# EAGLE board lm3410-boost-flashlight-driver-17mm-mk-1.0 (EAGLE 7.5.0)
VERSION: v1.0
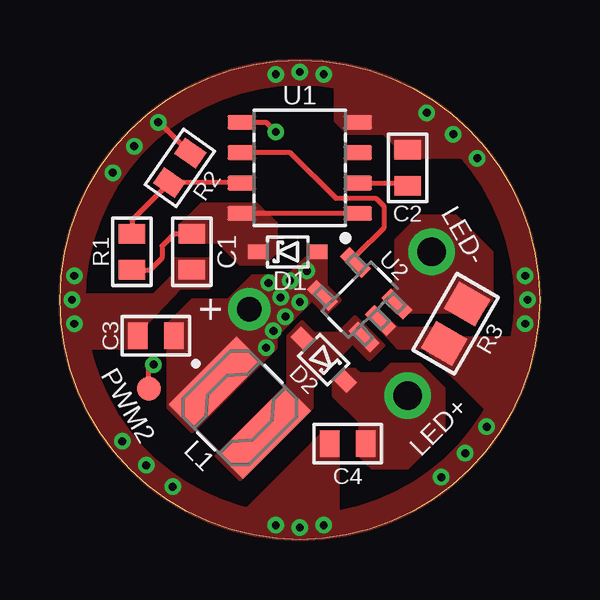
[diagram p0: board, top side]
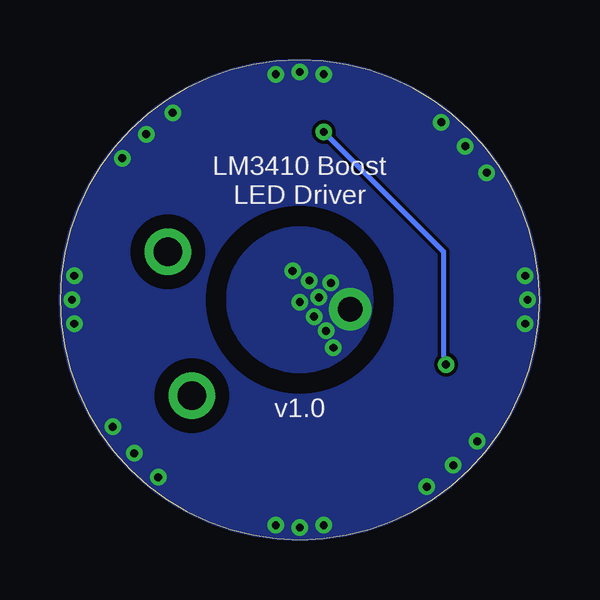
[diagram p1: board, bottom side, seen from below]

Size 20 x 20 mm. Coordinates in mm from the lower left corner, seen from the top.
Outline: 0,10 arc-180 20,10 arc-180 0,10
Copper layers (1*16): Top 0.0356mm / dielectric 1.5011mm / Bottom 0.0356mm
Design rules "LaenPCBOrder2 *": minimum track width 6mil, minimum drill 13mil, track to track 6mil, track to pad 6mil, pad to pad 6mil, via to via 6mil, smd to smd 6mil, copper to edge 0mil, drill to drill 6mil, minimum pad ring 7mil, minimum via ring 7mil, stop-mask expansion 3mil, vias tented up to drill 20mil, thermal gap 10mil
bRestrict: area 13.2,4.7 to 15.8,7.3; area 14.2,10.7 to 16.8,13.3; area 6.5,6.5 to 13.5,13.5

## Footprints (pad centres in the part's own frame; a part is rotated, then mirrored left to right if it is on the bottom)
1X01-1MM-CIR-NS = drill 1.016 pad 1.778: 1 0,0
1X01_NOSILK_NOSTOP = drill 0.33: P$1 0,0
C0603-TIGHTER = smd 0.8 x 1.1: 1 -0.75,0; 2 0.75,0
SOD323-SCHOTTKY = smd 0.8 x 0.6: A -1.25,0; C 1.25,0
LPS4012 = smd 1.5 x 4: P$1 -1.45,0; P$2 1.45,0
1X01-1.2MM-NS = drill 1.2 pad 1.93: P$1 0,0
1X01-SMD-1MM-DIA-NS = smd 1 x 1: P$1 0,0
R0603-TIGHTER = smd 0.8 x 1.1: 1 -0.75,0; 2 0.75,0
R0805 = smd 1.3 x 1.5: 1 -0.95,0; 2 0.95,0
SO08-NARROWER = smd 0.6 x 1.2: 1 -1.905,-2.416; 2 -0.635,-2.416; 3 0.635,-2.416; 4 1.905,-2.416; 5 1.905,2.416; 6 0.635,2.416; 7 -0.635,2.416; 8 -1.905,2.416
SOT95P285X120-5N = smd 1.27 x 0.559: 1 -1.219,0.965; 2 -1.219,0; 3 -1.219,-0.965; 4 1.219,-0.965; 5 1.219,0.965

## Placement (x,y rotation side)
+  M01PTH-1MM-CIR-NS  [1X01-1MM-CIR-NS]  7.9,9.6 180 top
-  M01NOT-A-VIA-NOPE  [1X01_NOSILK_NOSTOP]  0.5,10 90 bottom
C1  10u  [C0603-TIGHTER]  5.5,12 270 top
C2  1u  [C0603-TIGHTER]  14.5,15.5 90 top
C3  4u7  [C0603-TIGHTER]  4,8.5 180 top
C4  10u  [C0603-TIGHTER]  12,4 180 top
D1  BAT165  [SOD323-SCHOTTKY]  9.5,12 180 top
D2  BAT165  [SOD323-SCHOTTKY]  11,7.5 315 top
FRAME1  FRAME-LETTERNO_PACKAGE  [DUMMY]  0,0 0 top
L1  1uH  [LPS4012]  7.5,5.5 315 top
LED+  M01PTH-1.2MM-NS  [1X01-1.2MM-NS]  14.5,6 270 top
LED-  M01PTH-1.2MM-NS  [1X01-1.2MM-NS]  15.5,12 180 top
PWM2  M01SMD-1MM-DIA-NS  [1X01-SMD-1MM-DIA-NS]  3.7,6.3 270 top
R1  19K  [R0603-TIGHTER]  3,12 270 top
R2  4K7  [R0603-TIGHTER]  5,15.5 235 top
R3  0R127  [R0805]  16.5,9 60 top
U1  Tiny13  [SO08-NARROWER]  10,15.5 90 top
U2  LM3410XMF  [SOT95P285X120-5N]  12.5,10 135 top

## Library data of the parts
+ - C1-C4 D1 D2 L1 LED+ LED- PWM2 R1-R3 U1 = a_parts
FRAME1 = a_parts; DESIGNER: sean@yak.net; VERSION: v1.5
U2 = a_parts; MPN: LM3410XMF; OC_FARNELL: 1685357; OC_NEWARK: 75M6032; PACKAGE: SOT-5; SUPPLIER: National Semiconductor

## Nets
GND: -.P$1 C1.2 C2.2 C3.2 C4.2 R2.1 R3.1 U1.4 U2.2
N$1: R1.1 R2.2 U1.7
N$2: C2.1 U1.2
PWM2: PWM2.P$1 U1.5
PWM_W: U1.6 U2.4
SW: D2.A L1.P$2 U2.1
VBAT: +.1 C3.1 D1.A L1.P$1 U2.5
VCC: C1.1 D1.C R1.2 U1.1 U1.8
WHITE+: C4.1 D2.C LED+.P$1
WHITE-: LED-.P$1 R3.2 U2.3

## Tracks (layer width: path | path; a pad name or v marks a point on that pad's centre or on a via)
GND  (via drill 0.33)
  Top 0.2: R2.1 4.14,17.4 v4.1,17.4
  other vias: 19.5,10 10,19.5 11,19.4 9,19.4 0.6,11 0.6,9 19.4,11 19.4,9 10,0.5 9,0.6 11,0.6 3.6,3.1 2.6,4.1 4.7,2.2 3.1,16.4 2.2,15.3 16.4,16.9 17.4,15.9 15.3,17.8 16.9,3.6 15.9,2.6 17.8,4.7
  pour Top (isolate 0.152, rank 6, no thermals): 0,10 arc90 10,0 arc90 20,10 19,10 arc-90 10,1 arc-90 1,10
  pour Bottom (isolate 0.152, rank 6, no thermals): 10,0 arc-90 0,10 arc-90 10,20 arc-90 20,10 arc-90
  pour Top (isolate 0.152, rank 6, no thermals): 20,10 arc90 10,20 arc90 0,10 1,10 arc-90 10,19 arc-90 19,10
  pour Top (isolate 0.152, rank 5, no thermals): 0.4,10.2 0.5,8.5 1,8 3.6,8 3.6,9 5,10.5 6.2,10.5 6.2,11.7 4.7,11.7 4.7,11 3.9,10.2
  pour Top (isolate 0.152, rank 5, no thermals): 11,4.5 7.5,1 8,0.5 11.6,0.5 11.6,4.5
  pour Top (isolate 0.152, rank 5, no thermals): 14.1,8 15.2,8 17.8,5.4 19,6.6 19,8.4 16.3,8.4 15.9,8.8 14.1,8.8 13.1,9.7 12.8,9.4
  pour Top (isolate 0.152, rank 5, no thermals): 11.5,17.5 12,17 13.5,17 14,16.5 14,16 17,16 14.5,18.5 12.4,18.5 12.4,19 11.5,19
N$1
  Top 0.2: U1.7 7.56,14.89 R2.2 3,13.32 R1.1
N$2
  Top 0.2: U1.2 14.38,14.87 C2.1
PWM2  (via drill 0.33)
  Top 0.2: U1.5 8.6,17.41 v9,17 | PWM2.P$1 3.7,7.1 v3.9,7.3
  Bottom 0.2: v9,17 4,12 4,7.4 v3.9,7.3
PWM_W
  Top 0.2: U2.4 12.32,11.82 13.5,13 13.5,13.9 13.17,14.23 11.5,14.23 9.6,16.14 U1.6
SW
  pour Top (isolate 0.152, rank 5, no thermals): 6.5,3.5 7.5,2.5 10.5,5.5 10.5,6.5 12.2,8.2 12.9,7.5 13.5,8.1 12.3,9.3 11.6,8.6 10.6,8.6 10.1,9.1 9.5,8.5 9.5,6.5
VBAT  (via drill 0.33)
  other vias: 9.4,9.3 9.2,10.1 8.6,8 8.7,10.7 8.9,8.7 10,9.9 9.6,10.8 10.3,11.2
  pour Bottom (isolate 0.152, no thermals): 7,10 arc-180 13,10 arc-180
  pour Top (isolate 0.152, rank 5, no thermals): 4.5,9 4.5,5.5 5.5,4.5 9,8 9,8.5 10.5,10 11.1,9.4 11.7,10 11.1,10.6 11.1,12 10.5,12 9.5,11 8,11 7,10 5.5,10
VCC
  Top 0.2: U1.1 U1.8 | C1.1 4.75,12.75 4.25,12.25 4.25,11.75 3.75,11.25 R1.2
  pour Top (isolate 0.152, rank 5, no thermals): 5,13.1 5.9,14 8.2,14 9,13.2 9,12 8.5,11.5 7.5,11.5 6.6,12.4 5,12.4
WHITE+
  pour Top (isolate 0.152, rank 5, no thermals): 11.4,6.7 11.8,7.1 12.3,7.1 12.5,6.9 13.4,6.9 13.8,7.3 15,7.3 16,6.3 16,4.5 14.5,3 13,3 12.5,3.5 12.5,4.9 11.4,6
WHITE-
  pour Top (isolate 0.152, rank 5, no thermals): 13.5,10 14,9.5 16.7,9.5 17.1,9.1 18,10 18,12 16.5,13.5 15,13.5 14,12.5 14,10.5

## Text on the board
bPlace: LM3410 Boost / LED Driver